# Altium PCB PCB1.PcbDoc
Units mil, origin at the board's own origin, x right, y up, seen from the top; angles counter-clockwise.
Board outline 1377.95 x 1377.95 mil, 2 copper layers (Top Layer, Bottom Layer); 17 components, 12 nets, 52 pads, 36 vias.
Unrouted connection lines stored in the file: 2.
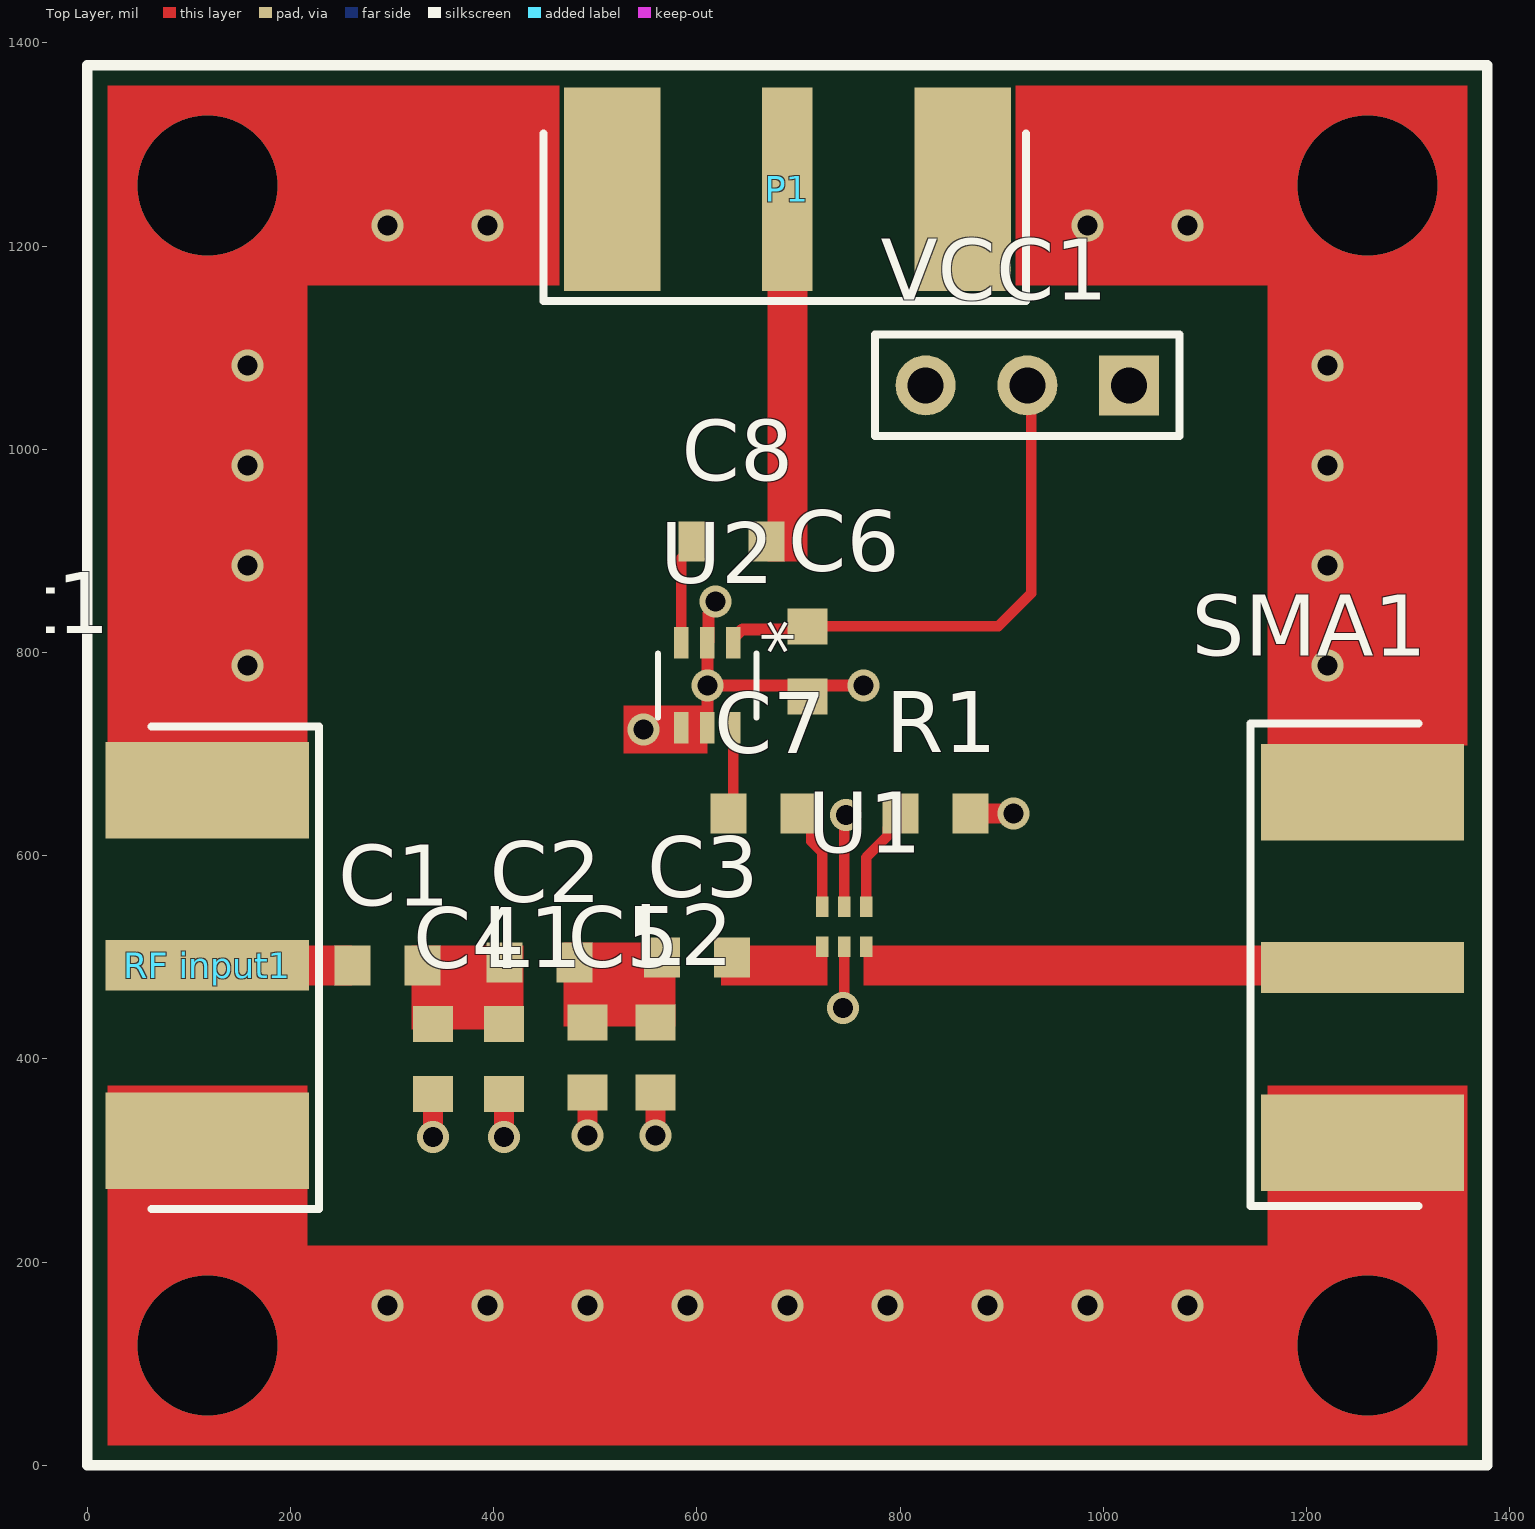
[diagram p0: Top Layer view]
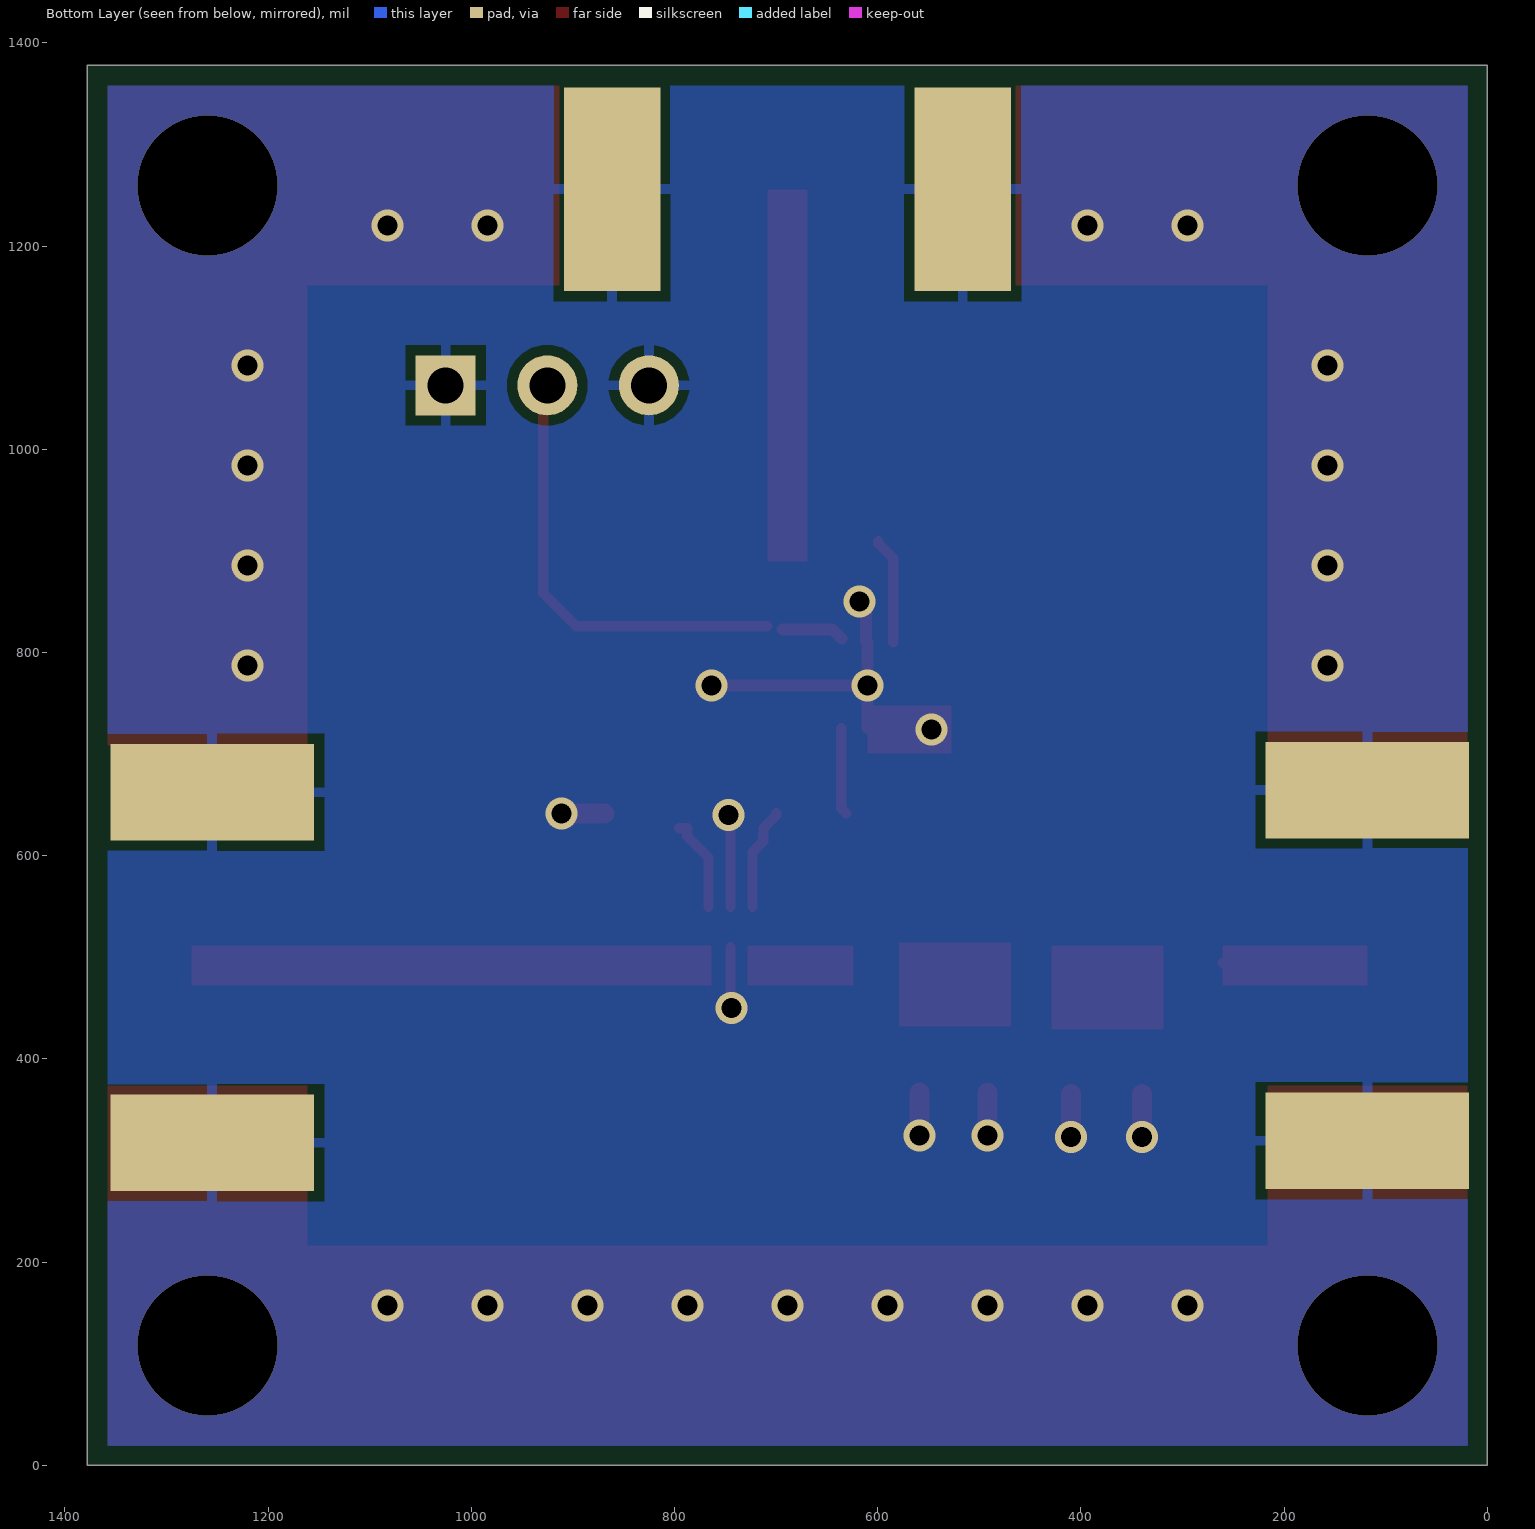
[diagram p1: Bottom Layer view, seen from below]
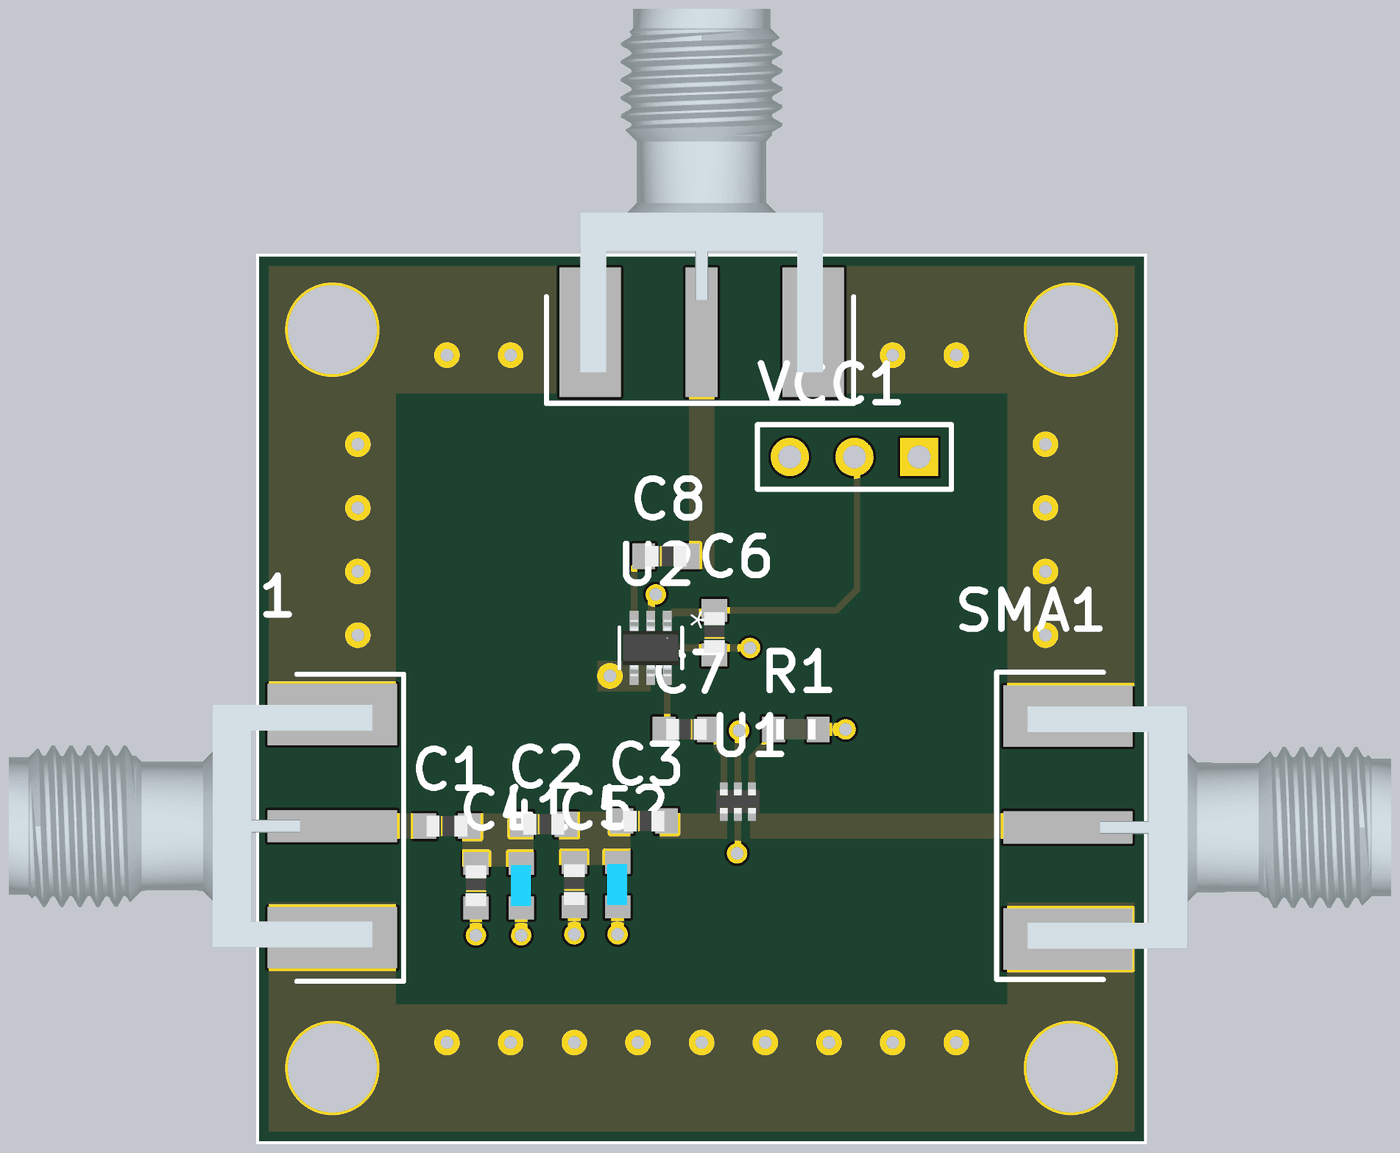
[diagram p2: 3D render of the assembled board from above, using the file's embedded part models]

## Layer stack, top to bottom
Top Solder: solder mask 0.4, Solder Resist, Dk 3.5
Top Layer: signal copper 1.4
Dielectric 1: dielectric 12.6, FR-4, Dk 4.8
Bottom Layer: signal copper 1.4
Bottom Solder: solder mask 0.4, Solder Resist, Dk 3.5

## Board outline
0,0 0,1377.95 1377.95,1377.95 1377.95,0

## Design rules (kind name [scope] priority, off if disabled: settings)
Clearance [All] p1: gap=10 ignorepadtopadclearanceinfootprint=FALSE except(0: Arc-Hole Track-Hole SMDPad-Hole THPad-Hole Via-Hole Fill-Hole Poly-Hole Region-Hole Text-Hole)
PolygonConnect PolygonConnect_via [IsVia vs IsPolygon] p1: connectstyle=Direct reliefconductorwidth=10 reliefentries=4 polygonreliefangle="90 Angle" airgapwidth=10
PolygonConnect [All] p2: connectstyle=Relief reliefconductorwidth=10 reliefentries=4 polygonreliefangle="90 Angle" airgapwidth=10
RoomDefinition Directional_Coupler [InComponentClass('Directional_Coupler')] p1: confinementstyle=ConfineIn formatcopy=TRUE lockcomponents=FALSE outline -565,-430 2271.65,-430 2271.65,2003.94 -565,2003.94
RoutingVias [All] p1: holewidth=28 width=50 viastyle="Through Hole" minholewidth=28 minwidth=50 maxholewidth=28 maxwidth=50
SolderMaskExpansion [All] p1: expansion=4 istentingtop=FALSE
Width [All] p1: maxlimit=78.74 minlimit=10 preferedwidth=10
30 further rules are at their usual default settings.

## Classes and differential pairs
component class Directional_Coupler: C2 C3 C4 C5 C6 C7 C8 L1 L2 P1 R1 "RF input1" SMA1 U1 U2 VCC1

## Components (designator, comment, footprint, x,y, rotation, side; value= is the part's Value field where it differs from the comment)
C1 "Cap 0603" CAPC1608X90N 295.28,492.13 r0 top value=0.6pF
C2 "Cap 0603" CAPC1608X90N 445,495 r0 top value=0.6pF
C3 "Cap 0603" CAPC1608X90N 600,500 r0 top value=0.6pF
C4 "Cap 0603" CAPC1608X90N 340,400 r90 top value=0.6pF
C5 "Cap 0603" CAPC1608X90N 492.13,401.57 r90 top value=0.6pF
C6 "Cap 0603" CAPC1608X90N 708.66,791.34 r90 top value=0.6pF
C7 "Cap 0603" CAPC1608X90N 665.35,641.73 r180 top value=0.6pF
C8 "Cap 0603" CAPC1608X90N 633.86,909.45 r0 top value=0.6pF
L1 "LQW18" INDC1608X100N 410,400 r90 top value=1nHy
L2 "LQW18" INDC1608X100N 559.06,401.57 r90 top value=1nHy
P1 "SMA" SMA-142-0701-851_V2 688.98,1255.91 r180 top
R1 "Resistor" RESC1508X55N 834.65,641.73 r180 top value="50 ohms"
"RF input1" "SMA" SMA-142-0701-851_V2 118.11,492.13 r270 top
SMA1 "SMA" SMA-142-0701-851_V2 1255,490 r90 top
U1 "HHM2215SA5" HHM-6_1P6X0P8 745,530 r90 top
U2 "BGA2866,115" SOT363_NXP 610.24,767.72 r270 top
VCC1 "Header 3" HDR1X3 1025.2,1062.99 r180 top

## Footprints (in the part's own frame and the unit in brackets; to place one, negate y for a bottom-side part, rotate by r counter-clockwise, add the part's x,y. Pads: shape width x height; smd on the part's side, far side on the other; paste and mask are expansions set on the pad)
CAPC1608X90N [mm]
  rect 0.9x1 smd: 1(-0.875,0) 2(0.875,0)
  body extent -0.8,-0.41 0.8,0.41, height 0.89
HDR1X3 [mm] "Connector; Header; 3 Position"
  rect 1.5x1.5 hole 0.9: 1(0,0)
  round 1.5 hole 0.9: 2(2.54,0) 3(5.08,0)
  silkscreen extent -1.27,-1.27 6.35,1.27
HHM-6_1P6X0P8 [mil]
  rect 20x12 smd paste+0 mask+0: 1(-19.68,21.65) 2(-19.68,0) 3(-19.68,-21.65) 4(19.68,-21.65) 5(19.68,0) 6(19.68,21.65)
  body extent -19,-34 19,34, height 28
INDC1608X100N [mm] "Inductor LQW0603"
  rect 0.9x1 smd: 1(-0.875,0) 2(0.875,0)
  body extent -0.8,-0.38 0.8,0.42, height 1
RESC1508X55N [mm]
  rect 0.9x1 smd: 1(-0.875,0) 2(0.875,0)
  body extent -0.77,-0.4 0.78,0.4, height 0.55
SMA-142-0701-851_V2 [mil] "SMA 50 Ohm, End Launch Jack Receptacle, Tab Contact"
  rect 50x200 smd: 1(0,0)
  rect 95x200 smd: 2(-172.5,0) 2(172.5,0)
  rect 95x200 smd far side: 2(-172.5,0) 2(172.5,0)
  silkscreen extent -235,-55 240,110, body extent -188,-500 188,62, height 161
SOT363_NXP [mil]
  rect 31x14 smd paste+0 mask+0: 1(-42,25.59) 2(-42,0) 3(-42,-25.59) 4(42,-25.59) 5(42,0) 6(42,25.59)
  silkscreen extent -32,-49 32,49, body extent -44,-44 44,44, height 43

## Part data
C1 C2 C3 C4 C5 C6 C7 C8: library part Cap, "Capacitor GRM18 0603", LatestRevisionDate=17-Jul-2002, LatestRevisionNote="Re-released for DXP Platform.", PackageDescription="Polarized Capacitor; 2 Leads", PackageReference=POLAR0.8, Published=8-Jun-2000, Publisher="Altium Limited", Supplier 1=Mouser
L1 L2: "Ind RF Chip Wirewound 18nH 5% 100MHz 40Q-Factor 550mA 0603 Paper T/R", Package=None, Availability=Unavailable, MP=LQW18AN18NJ00D, Parameter 1=LQW0603, Price=None
P1: library part SMB, "SMB Straight Connector", LatestRevisionDate=17-Jul-2002, LatestRevisionNote="Re-released for DXP Platform.", Publisher="Altium Limited"
R1: "Resistor RMC0603", Mfr_Name="Stackpole International"
"RF input1" SMA1: "SMA Straight Connector", LatestRevisionDate=17-Jul-2002, LatestRevisionNote="Re-released for DXP Platform.", Publisher="Altium Limited"
U1: "No Description Available", Mfr_Name=TDK, RefDes=RefDes, Type=Type
U2: "No Description Available", Mfr_Name=NXP, RefDes=RefDes, Type=Type
VCC1: "Header, 3-Pin", LatestRevisionDate=17-Jul-2002, LatestRevisionNote="Re-released for DXP Platform.", Publisher="Altium Limited"

## Via types
v1: diameter 31.5, hole 19.68, Top Layer to Bottom Layer, 32 vias
v2: diameter 137.8, hole 137.8, Top Layer to Bottom Layer, 4 vias

## Nets (pads, with @x,y where several pads share a name; then routed paths per layer and width w, separated by ;. In a path a pad name is that pad's centre, name@x,y a point inside that pad or via, vN(x,y) a via of type N, cw(c..) or ccw(c..) an arc to the next point about the centre after c; other vN are vias at no path point)
GND: "RF input1.2" C4.1 C5.1 C6.1 L1.1 L2.1 P1.2 R1.1 SMA1.2 U1.2 U1.5 U2.2 U2.4 U2.5 VCC1.1 VCC1.3 | length 645.7
  Top Layer w10: v1@745,447.91 U1.2 ; U1.5 v1@745,639.9
  Top Layer w11.81: U2.5 v1(610.24,767.72) ; v1(618.11,850.39) 618.11,845.07 611.33,838.29 611.33,810.81 U2.2 v1(610.24,767.72) ; v1(763.78,767.72) v1(610.24,767.72)
  Top Layer w19.68: v1(340,323.23) C4.1 ; v1(410,323.23) L1.1 ; v1(492.13,324.8) C5.1 ; v1(559.06,324.8) L2.1 ; R1.1 v1(911.42,641.73)
  other v1: 295.28,157.48 393.7,157.48 492.13,157.48 590.55,157.48 688.98,157.48 787.4,157.48 885.83,157.48 984.25,157.48 1082.68,157.48 743.79,450.01 746.82,639.9 547.24,724.41 157.48,787.4 1220.47,787.4 157.48,885.83 1220.47,885.83 157.48,984.25 1220.47,984.25 157.48,1082.68 1220.47,1082.68 295.28,1220.47 393.7,1220.47 984.25,1220.47 1082.68,1220.47
  other v2: 118.11,118.11 1259.84,118.11 118.11,1259.84 1259.84,1259.84
NetC1_1: "RF input1.1" C1.1 | length 4.1
  Top Layer w10: C1.1@257.68,492.13 C1.1@260.55,495
NetC1_2: C1.2 C2.1 C4.2 L1.2
NetC2_2: C2.2 C3.1 C5.2 L2.2
NetC3_2: C3.2 U1.1
NetC6_2: C6.2 U2.1 VCC1.2 | length 501.8
  Top Layer w10: C6.2 896.65,825.79 929.13,858.27 929.13,1059.06 VCC1.2
  Top Layer w11.81: U2.1@635.83,813.97 644.69,822.83 C6.2@693.67,822.83
NetC7_1: C7.1 U1.6 | length 101.8
  Top Layer w10: C7.1 699.8,639.76 712.52,627.05 712.52,621.27 712.6,621.19 712.6,614.17 723.35,603.43 U1.6
NetC7_2: C7.2 U2.6 | length 86
  Top Layer w10: C7.2 635.83,646.65 U2.6
NetC8_1: C8.1 U2.3 | length 105.8
  Top Layer w10: U2.3 584.65,892.72 599.41,907.48 C8.1
NetC8_2: C8.2 P1.1
NetR1_2: R1.2 U1.4 | length 93.9
  Top Layer w10: U1.4 766.65,598.35 787.48,619.17 787.48,627.05 R1.2@795.35,627.05
NetSMA1_1: SMA1.1 U1.3

## Polygon pours and split planes (outlines as drawn)
GND on Bottom Layer "GND_L02_P000" (solid, pour order 0): 19.29,19.29 19.29,1357.87 1357.87,1357.87 1357.87,19.29

## Other copper
Top Layer:
  region net NetSMA1_1: 1275.59,511.81 763.78,511.81 763.78,472.44 1275.59,472.44
  rectangle net NetC3_2: 623.62,472.44 728.35,511.81
  rectangle net NetC2_2: 468.62,432.01 578.86,514.68
  rectangle net NetC1_2: 318.9,429.13 429.13,511.81
  region net NetC1_1: 260.55,511.81 118.11,511.81 118.11,472.44 260.55,472.44
  region net GND: 1358.27,1358.27 913.39,1358.27 913.39,1161.42 1358.27,1161.42
  region net GND: 610.24,748.03 527.56,748.03 527.56,700.79 610.24,700.79
  region net NetC8_2: 669.29,1255.91 669.29,889.76 708.66,889.76 708.66,1255.91
  rectangle net GND: 19.68,708.66 216.54,1358.27
  rectangle net GND: 1161.42,708.66 1358.27,1358.27
  rectangle net GND: 19.68,1161.42 464.57,1358.27
  region net GND: 1358.27,216.54 19.69,216.54 19.69,19.69 1358.27,19.69
  region net GND: 216.54,374.02 19.69,374.02 19.69,19.69 216.54,19.69
  region net GND: 1358.27,374.02 1161.42,374.02 1161.42,19.69 1358.27,19.69

## Silkscreen, mask and mechanical layers (free items; w line width, h text height)
Top Overlay:
  the board outline again, w10

## Dimensions
1377.95,1377.95 to 1377.95,0 on Top Overlay
0,1377.95 to 1377.95,0 on Top Overlay

## Text inside footprints (layer, text, board x,y; h text height)
U2: Top Overlay "*" at 644.83,832.22 h50 r270; Mechanical 13 "*" at 600.74,791.72 h50 r270